# Altium PCB StepTMC5160.PcbDoc (part 2 of 3)
Units mm, origin at the board's own origin, x right, y up, seen from the top; angles counter-clockwise.
Board outline 109.42 x 88.01 mm, 4 copper layers (Component Side, GND, VCC, Bottom Layer), stack 0.778 mm thick; 190 components, 123 nets, 661 pads, 738 vias.
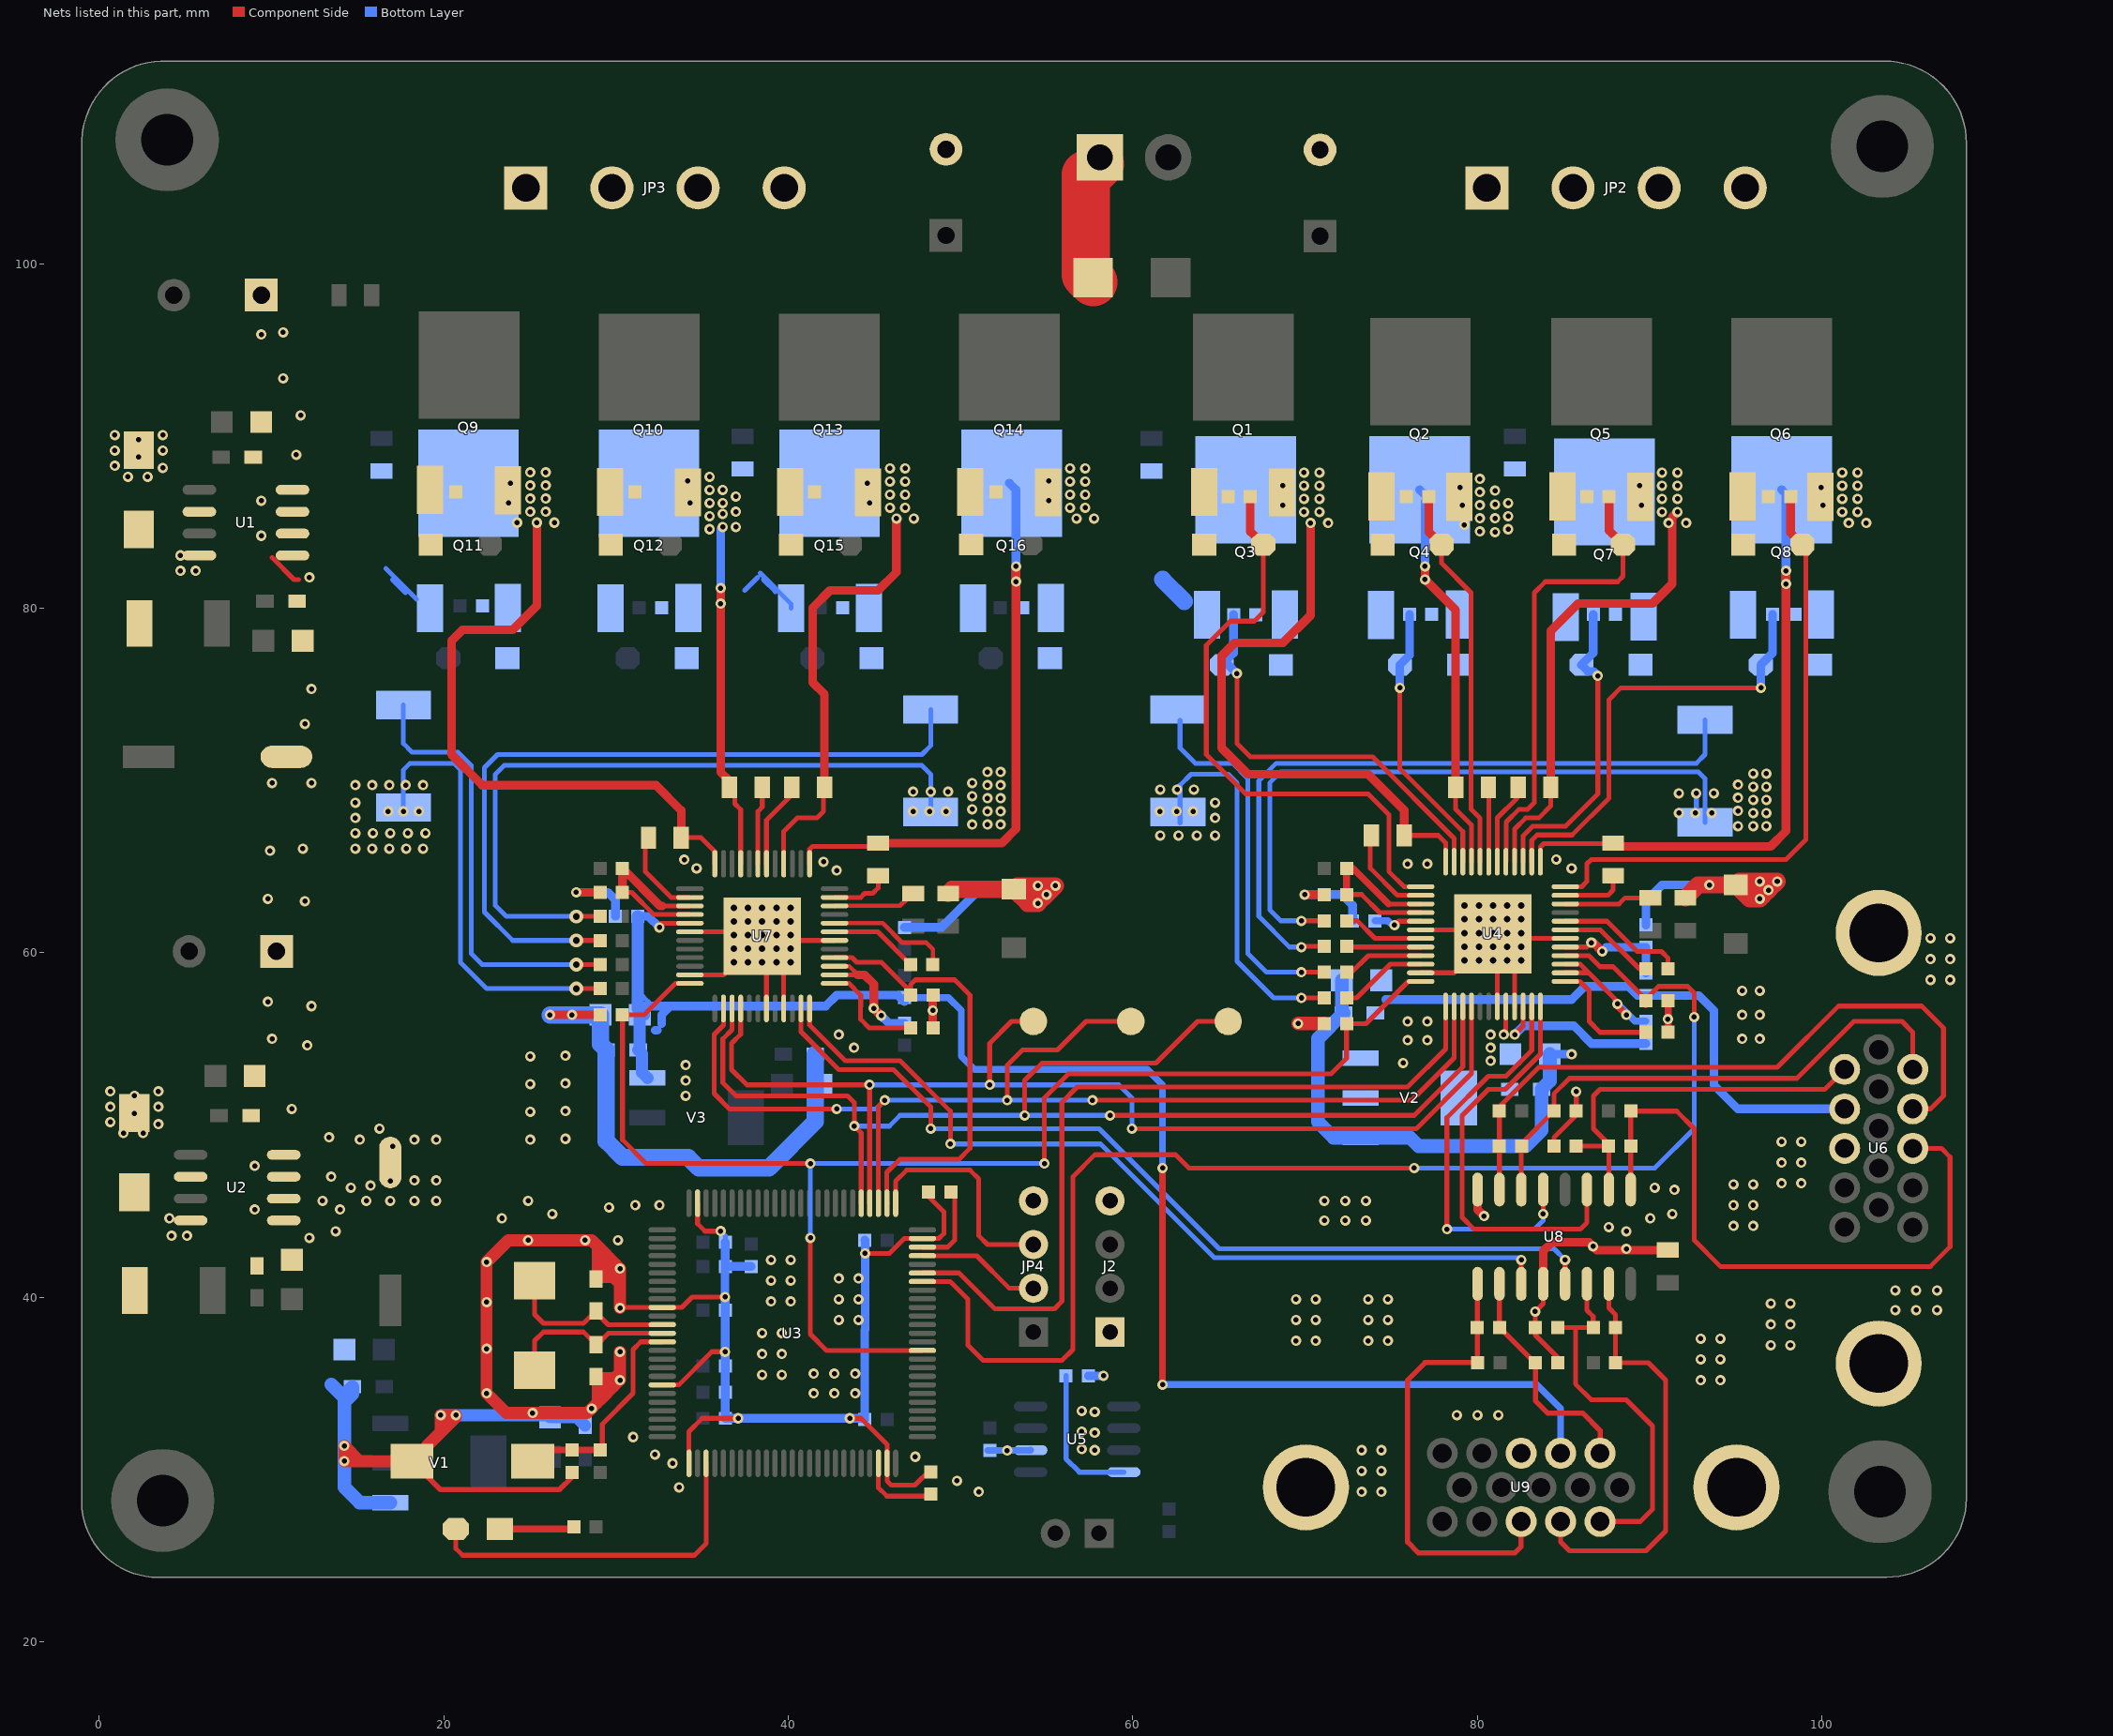
[diagram p4: the nets of this part, all layers, seen from the top]

## Via types
v1: diameter 0.6, hole 0.3, Component Side to Bottom Layer, 596 vias
v2: diameter 0.8, hole 0.4, Component Side to Bottom Layer, 60 vias
v3: diameter 0.762, hole 0.381, Component Side to Bottom Layer, 50 vias
v4: diameter 0.5, hole 0.5, Component Side to Bottom Layer, tented both sides, 32 vias

## Nets (pads, with @x,y where several pads share a name; then routed paths per layer and width w, separated by ;. In a path a pad name is that pad's centre, name@x,y a point inside that pad or via, vN(x,y) a via of type N, cw(c..) or ccw(c..) an arc to the next point about the centre after c; other vN are vias at no path point) (continued)
DGND: C1.1 C4.1 C5.1 C6.1 C7.1 C8.1 C9.2 C10.1 C11.1 C12.2 C15.1 C16.1 C17.1 C18.1 C19.1 C20.1 C21.1 C22.1 C23.2 C24.2 C25.1 C26.1 C27.1 C28.1 C33.1 C34.1 C35.1 C40.1 C41.1 C42.2 C43.2 C55.1 C56.1 C57.1 C58.1 C59.1 C60.1 C61.1 C62.1 C63.1 C64.1 C65.1 C66.1 CE1.2 CE2.1 CE3.1 CE4.2 D3.1 D6.1 D13.1 E1.2 E2.2 E3.2 E4.2 J2.1 J2.4 JP1.1 JP4.4 R8.1 R9.2 R15.2 R19.2 R20.1 R22.2 R23.2 R24.2 R32.1 R33.2 R39.2 R43.2 R45.1 R47.2 R48.2 R51.1 R53.1 R55.1 R58.1 R63.1 S1.2 U1.4 U1.5 U1.6 U1.7 U1.8 U2.4 U2.5 U2.6 U2.7 U2.8 U3.10 U3.19 U3.26 U3.49 U3.74 U3.99 U4.6 U4.11 U4.19 U4.21 U4.30 U4.49 U5.2 U6.3 U6.16 U6.17 U7.6 U7.11 U7.19 U7.21 U7.30 U7.49 U8.8 U8.12 U9.3 U9.16 U9.17 V1.1 V2.1 V3.1 | length 472.3
  Component Side w0.279: 10.033,82.931 11.303,81.661 11.557,81.661 ; v2(27.686,57.912) R33.2@29.068,57.912 ; v2(27.686,62.103) R48.2@29.068,62.103 ; v1(30.226,39.37) 30.259,39.403 U3.10@32.678,39.403 33.815,39.403 34.417,40.005 v1(36.322,40.005) ; U3.19@32.678,34.903 33.633,34.903 35.56,36.83 v1(36.322,36.83) ; U3.26@34.228,30.353 34.228,32.196 34.998,32.966 v1(37.084,32.966) ; U7.6@34.277,61.214 U7.6@34.282,61.209 38.232,61.209 U7.49@38.481,60.96 ; U7.11@34.282,58.71 36.231,58.71 U7.49@38.481,60.96 ; U3.99@34.728,45.453 34.728,44.266 35.164,43.83 v1(36.068,43.83) ; U7.19@38.73,56.759 U7.49@38.73,60.711 ; U7.21@39.731,56.759 39.731,59.71 U7.49@38.732,60.709 ; U7.30@42.68,60.709 39.306,60.709 U7.49@38.732,60.709 ; v1(43.561,32.966) 44.22,32.966 45.728,31.458 U3.49@45.728,30.353 45.728,29.329 45.974,29.083 47.341,29.083 C43.2@48.26,30.002 ; v1(44.45,42.545) 45.877,42.545 46.735,43.403 U3.74@47.778,43.403 48.737,43.403 49.022,43.688 49.022,44.958 48.133,45.847 C42.2@48.133,46.101 ; v1@69.723,61.849 R23.2@71.105,61.849 ; v1@69.818,57.372 R9.2@71.105,57.372 ; U4.11@76.708,58.826 78.656,58.826 U4.49@80.907,61.077 ; U4.6@76.708,61.326 U4.49@79.007,61.326 ; U4.49@80.658,61.326 U4.49@80.907,61.077 ; U4.19@81.156,56.876 U4.49@81.156,60.764 ; U4.21@82.156,56.876 82.156,59.827 U4.49@81.158,60.825 ; U8.12@83.82,40.776 83.82,39.624 v1(83.36,39.164) R53.1@83.36,38.227 83.36,37.798 84.668,36.49 R63.1@84.668,36.195 ; R55.1@84.44,48.768 84.44,49.261 85.74,50.561 R58.1@85.74,50.8 v1(85.74,51.928) v1@85.725,51.943 ; U4.30@85.105,60.825 U4.49@81.158,60.825 ; U7.49@38.481,60.96 U7.49@38.73,60.711 ; U7.49@38.73,60.711 U7.49@38.732,60.709 ; U4.49@80.907,61.077 U4.49@81.158,60.825
  Component Side w0.3: S1.2@18.146,30.48 19.797,28.829 26.7,28.829 27.432,29.561 C63.1@27.432,29.83
  Component Side w0.4: R22.2@91.074,55.372 R19.2@91.074,57.213
  Component Side w0.5: v1(26.162,56.388) v1(27.432,56.388) R39.2@29.068,56.388 ; v1(27.686,63.5) C34.1@29.068,63.5 ; 28.892,33.846 28.829,33.909 28.829,34.544 ; 28.956,42.926 28.829,42.799 28.829,42.037 ; 29.21,34.163 28.829,34.544 ; 29.337,42.545 28.829,42.037 ; 29.591,42.291 C64.1@28.829,41.529 ; 29.845,34.798 29.426,34.798 ; v1(30.226,35.179) 30.01,35.395 ; 30.226,40.64 29.807,41.059 ; 30.226,41.021 30.188,41.059 30.086,41.059 ; R47.2@48.402,55.626 48.387,55.641 v1(48.387,56.642) 48.387,57.516 R43.2@48.402,57.531 ; v1(69.977,63.373) C1.1@71.105,63.373 ; U8.8@80.01,46.247 80.01,45.085 v1(80.391,44.704) ; U8.12@83.82,40.776 83.82,42.672 84.328,43.18 86.487,43.18 v1(86.71,42.957) 86.934,42.733 C66.1@91.059,42.733 ; 28.829,34.544 C65.1@28.829,35.395 ; C65.1@28.829,35.395 29.426,34.798 ; C65.1@28.829,35.395 30.01,35.395 ; C64.1@28.829,41.059 C64.1@28.829,41.529 ; C64.1@28.829,41.059 C64.1@29.121,41.059 ; C64.1@28.829,41.059 29.458,41.688 ; C64.1@28.829,41.529 28.829,42.037 ; C64.1@29.121,41.059 29.35,41.288 ; C64.1@29.121,41.059 29.807,41.059 ; 29.35,41.288 29.578,41.288 29.807,41.059 ; 29.35,41.288 29.604,41.542 ; 29.426,34.798 29.426,34.811 30.01,35.395 ; 29.458,41.688 29.604,41.542 ; 29.458,41.688 29.68,41.91 29.972,41.91 29.604,41.542 ; 29.604,41.542 30.086,41.059 ; 29.807,41.059 30.086,41.059
  Component Side w0.7: 29.426,34.798 29.21,34.582 29.21,34.163 ; 30.01,35.395 30.226,35.611 ; v1(30.226,36.83) 30.226,35.611 ; v1(30.226,39.37) 30.226,40.64 30.226,41.021 v1(30.226,41.656) 29.972,41.91 29.591,42.291 29.337,42.545 28.956,42.926 28.575,43.307 v1(28.194,43.307) v1(24.892,43.307) 23.749,43.307 v1(22.479,42.037) v1(22.479,39.709) v1(22.479,36.999) v1(22.479,34.417) 23.622,33.274 v1(25.146,33.274) 28.321,33.274 v1(28.575,33.528) 28.892,33.846 29.21,34.163 ; 15.113,30.48 v1(14.224,31.369) v1(14.224,30.48) 15.113,30.48 ; 15.113,30.48 S1.2@18.146,30.48 19.812,32.146 ; 19.812,32.146 20.701,33.035 v1(20.701,33.147) v1(19.812,33.147) 19.812,32.146 ; 29.21,34.163 29.845,34.798 v1(30.226,35.179) 30.226,35.611
  Component Side w0.8: v1(69.596,55.88) R15.2@71.105,55.88
  Component Side w1: C35.1@49.276,63.434 49.518,63.676 E3.2@53.086,63.676 ; C4.1@92.075,63.18 92.825,63.93 v1(93.472,63.93) E4.2@94.996,63.93 ; E3.2@53.086,63.676 55.04,63.676 v1@55.245,63.881 ; E3.2@53.086,63.676 53.897,62.865 v1(54.483,62.865) v1(54.991,63.373) v1(55.499,63.881) v1@55.245,63.881 ; E3.2@53.086,63.676 53.291,63.881 v1(54.483,63.881) v1@55.245,63.881 ; E4.2@94.996,63.93 96.95,63.93 v1@97.155,64.135 ; E4.2@94.996,63.93 95.201,64.135 v1(96.393,64.135) v1@97.155,64.135 ; E4.2@94.996,63.93 95.807,63.119 v1(96.393,63.119) v1(96.901,63.627) v1(97.409,64.135) v1@97.155,64.135
  Component Side w2.8: D13.1@57.694,98.933 57.277,99.35 57.277,105.156 57.456,105.156 JP1.1@58.091,105.791
  Bottom Layer w0.279: R32.1@17.653,68.424 17.653,70.612 18.034,70.993 20.574,70.993 20.955,70.612 20.955,59.436 22.479,57.912 v2(27.686,57.912) ; v2(27.686,62.103) 23.622,62.103 22.987,62.738 22.987,70.358 23.495,70.866 47.752,70.866 48.26,70.358 v1(48.26,69.342) R45.1@48.26,68.17 ; v1(36.068,43.83) 36.337,43.561 C61.1@36.337,43.18 ; R8.1@62.738,67.535 62.738,69.723 63.373,70.358 65.532,70.358 66.04,69.85 66.04,59.5 68.167,57.372 v1(69.787,57.372) v1@69.818,57.372 ; v1(69.787,61.849) 68.58,61.849 67.945,62.484 67.945,69.85 68.58,70.485 92.837,70.485 93.218,70.104 R20.1@93.218,67.564 ; R20.1@92.71,68.072 v1(92.71,69.244)
  Bottom Layer w0.4: C33.1@51.562,31.1 C33.1@51.689,31.1 v1(52.705,31.1) 54.049,31.1 U5.2@54.064,31.115
  Bottom Layer w0.5: v1(27.686,63.5) 29.518,63.5 29.957,63.061 C41.1@29.957,62.103 ; C61.1@36.337,43.18 C57.1@36.337,41.783 ; R51.1@37.846,41.768 37.831,41.783 C57.1@36.337,41.783 ; C55.1@44.435,43.307 44.45,43.292 v1(44.45,42.545) 44.45,38.115 44.435,38.1 C62.1@44.435,32.893 44.362,32.966 v1(43.561,32.966) v1(37.084,32.966) C60.1@36.337,32.966 C59.1@36.337,34.49 C56.1@36.337,36.014 C58.1@36.337,39.243 36.337,39.99 v1(36.322,40.005) 36.322,41.768 C57.1@36.337,41.783 ; C40.1@46.736,61.468 48.895,61.468 51.308,63.881 v1(54.483,63.881) v1(55.499,63.881) ; R24.2@57.419,35.433 v1(58.293,35.433) ; v1(69.977,63.373) 72.136,63.373 72.756,62.753 C16.1@72.756,61.849 ; C19.1@84.201,54.102 v1(85.471,54.102) ; C15.1@89.789,61.61 89.789,62.992 90.727,63.93 v1(93.472,63.93)
  Bottom Layer w0.7: v1(19.812,33.147) v1(20.701,33.147) 26.035,33.147 C10.1@26.162,33.02 27.724,33.02 C11.1@28.194,32.55
  Bottom Layer w0.8: 13.462,34.925 14.059,34.328 14.224,34.328 ; V1.1@16.891,28.067 15.113,28.067 14.224,28.956 v1(14.224,30.48) v1(14.224,31.369) 14.224,33.909 ; C17.1@72.136,58.395 72.136,56.579 C18.1@72.225,56.49 70.739,55.004 70.739,50.165 71.642,49.262 V2.1@73.223,49.262 76.09,49.262 76.584,48.768 82.804,48.768 83.731,49.695 C20.1@83.731,52.07 84.201,52.54 C19.1@84.201,54.102 ; 14.224,33.909 14.694,34.379 C8.1@14.694,34.798 14.224,34.328 ; 14.224,33.909 14.224,34.328
  Bottom Layer w1: v1(26.162,56.388) v1(27.432,56.388) C25.1@29.083,56.388 29.083,54.699 C26.1@29.426,54.356 29.426,49.06 30.367,48.119 V3.1@31.821,48.119 34.177,48.119 34.798,47.498 38.862,47.498 41.567,50.203 C28.1@41.567,54.102
  other v1: 51.054,28.702 73.279,28.702 74.422,28.702 33.655,28.956 49.784,29.337 73.279,29.909 74.422,29.909 33.274,30.353 47.371,30.734 32.258,30.861 57.785,31.115 73.279,31.115 74.422,31.115 57.023,31.178 30.988,31.877 57.785,32.131 57.023,32.194 78.803,33.147 80.01,33.147 81.216,33.147 57.785,33.337 57.023,33.401 41.465,34.417 42.672,34.417 43.878,34.417 92.964,35.179 94.107,35.179 38.481,35.496 39.624,35.496 41.465,35.56 42.672,35.56 43.878,35.56 92.964,36.386 94.107,36.386 38.481,36.703 39.624,36.703 97.028,37.211 98.171,37.211 69.469,37.465 70.612,37.465 73.66,37.465 74.803,37.465 92.964,37.592 94.107,37.592 38.481,37.91 39.624,37.91 97.028,38.417 98.171,38.417 42.926,38.672 44.069,38.672 69.469,38.672 70.612,38.672 73.66,38.672 74.803,38.672 104.267,39.243 105.474,39.243 106.68,39.243 97.028,39.624 98.171,39.624 38.989,39.751 40.132,39.751 42.926,39.878 44.069,39.878 69.469,39.878 70.612,39.878 73.66,39.878 74.803,39.878 104.267,40.386 105.474,40.386 106.68,40.386 38.989,40.957 40.132,40.957 42.926,41.084 44.069,41.084 38.989,42.164 40.132,42.164 88.646,42.799 30.099,43.307 12.192,43.434 4.191,43.561 5.08,43.561 13.716,43.815 88.646,43.815 87.63,44.069 94.869,44.133 96.012,44.133 71.12,44.45 72.326,44.45 73.533,44.45 4.064,44.577 23.368,44.577 90.043,44.577 26.289,44.831 91.313,44.831 9.017,45.085 13.97,45.085 29.591,45.212 31.115,45.339 32.512,45.339 94.869,45.339 96.012,45.339 12.954,45.593 15.494,45.593 16.891,45.593 18.288,45.593 19.558,45.593 24.892,45.593 71.12,45.593 72.326,45.593 73.533,45.593 91.44,46.228 14.605,46.355 90.297,46.355 15.748,46.482 94.869,46.545 96.012,46.545 97.663,46.609 98.806,46.609 16.891,46.736 18.288,46.778 19.558,46.778 13.462,46.99 9.017,47.625 97.663,47.816 98.806,47.816 17.018,48.768 97.663,49.022 98.806,49.022 15.113,49.149 18.288,49.149 19.558,49.149 25.019,49.149 27.051,49.191 13.335,49.276 1.397,49.53 2.54,49.53 16.256,49.784 3.429,50.038 0.635,50.165 2.032,50.673 25.019,50.758 27.051,50.8 11.176,50.927 0.635,51.054 3.429,51.054 2.032,51.689 34.036,51.689 0.635,51.943 3.429,51.943 25.019,52.366 27.051,52.409 34.036,52.578 34.036,53.467 75.692,53.594 25.019,53.975 27.051,54.017 43.815,54.483 12.065,54.61 75.946,54.912 77.089,54.912 10.033,54.991 95.377,54.991 96.393,54.991 42.926,55.245 75.946,56.007 77.089,56.007 91.059,56.134 95.377,56.388 96.393,56.388 12.319,56.896 9.779,57.15 95.377,57.785 96.393,57.785 106.299,58.42 107.442,58.42 106.299,59.627 107.442,59.627 106.299,60.833 107.442,60.833 11.938,62.992 9.779,63.119 42.799,64.77 34.671,64.897 85.471,64.897 75.946,65.151 77.089,65.151 42.037,65.278 33.955,65.397 84.582,65.405 9.906,65.913 11.811,66.04 14.859,66.04 15.843,66.04 16.828,66.04 17.812,66.04 18.796,66.04 61.595,66.802 62.653,66.802 63.712,66.802 64.77,66.802 14.859,66.929 15.875,66.929 16.891,66.929 17.907,66.929 18.923,66.929 95.123,67.339 96.012,67.339 96.774,67.339 50.673,67.437 51.562,67.437 52.324,67.437 14.859,67.818 64.77,67.818 91.694,68.101 92.647,68.101 93.599,68.101 96.012,68.101 96.774,68.101 16.764,68.199 17.653,68.199 18.542,68.199 47.244,68.199 48.197,68.199 49.149,68.199 51.562,68.199 52.324,68.199 61.563,68.199 62.547,68.199 63.5,68.199 95.123,68.228 50.673,68.326 14.859,68.707 64.77,68.707 96.012,68.863 96.774,68.863 51.562,68.961 52.324,68.961 95.123,68.99 50.673,69.088 91.694,69.244 93.726,69.244 47.244,69.342 49.276,69.342 61.595,69.469 62.569,69.469 63.542,69.469 96.012,69.625 96.774,69.625 14.859,69.723 15.843,69.723 16.828,69.723 17.78,69.723 18.796,69.723 51.562,69.723 52.324,69.723 95.123,69.752 10.033,69.85 12.319,69.85 50.673,69.85 96.012,70.387 96.774,70.387 51.562,70.485 52.324,70.485 11.938,73.279 12.319,75.311 12.192,81.788 4.699,82.169 5.588,82.169 4.699,83.058 9.398,84.201 9.398,86.233 1.651,87.63 2.794,87.63 3.683,88.138 0.889,88.265 2.286,88.773 11.43,88.9 0.889,89.154 3.683,89.154 2.286,89.789 0.889,90.043 3.683,90.043 11.684,91.186 10.668,93.345 9.398,95.885 10.668,96.012
  other v3: 36.83,59.436 37.655,59.436 38.481,59.436 39.306,59.436 40.132,59.436 79.256,59.553 80.081,59.553 80.907,59.553 81.732,59.553 82.558,59.553 36.83,60.23 37.655,60.23 38.481,60.23 39.306,60.23 40.132,60.23 79.256,60.347 80.081,60.347 80.907,60.347 81.732,60.347 82.558,60.347 36.83,61.023 37.655,61.023 38.481,61.023 39.306,61.023 40.132,61.023 79.256,61.14 80.081,61.14 80.907,61.14 81.732,61.14 82.558,61.14 36.83,61.817 37.655,61.817 38.481,61.817 39.306,61.817 40.132,61.817 79.256,61.934 80.081,61.934 80.907,61.934 81.732,61.934 82.558,61.934 36.83,62.611 37.655,62.611 38.481,62.611 39.306,62.611 40.132,62.611 79.256,62.728 80.081,62.728 80.907,62.728 81.732,62.728 82.558,62.728
LED: LED1.2 U3.28 | length 20.8
  Component Side w0.279: LED1.2@20.701,26.543 20.701,25.4 21.082,25.019 34.544,25.019 35.228,25.703 U3.28@35.228,30.353
M1_ENA+: R54.2 R55.2 U6.1 U8.2 | length 22.9
  Component Side w0.279: R55.2@85.74,48.768 R54.2@87.615,48.768 ; U8.2@87.63,46.247 87.63,48.753 R54.2@87.615,48.768 ; U6.1@101.321,53.223 100.167,52.07 87.122,52.07 86.741,51.689 86.741,49.784 87.615,48.91 R54.2@87.615,48.768
M1_ENA-: R50.1 R54.1 U6.13 U8.1 | length 38.7
  Component Side w0.279: U8.1@88.9,46.247 88.9,50.785 R50.1@88.915,50.8 91.567,50.8 92.583,49.784 92.583,43.307 94.107,41.783 106.299,41.783 107.442,42.926 107.442,48.133 106.934,48.641 U6.13@105.283,48.641
M1_ENB+: R58.2 R59.2 U6.11 U8.6 | length 31.3
  Component Side w0.279: U8.6@82.55,46.247 82.55,48.753 R59.2@82.565,48.768 82.565,48.925 R58.2@84.44,50.8 84.44,51.801 85.344,52.705 98.552,52.705 101.854,56.007 104.648,56.007 105.283,55.372 U6.11@105.283,53.223
M1_ENB-: R59.1 R61.1 U6.12 U8.7 | length 39.6
  Component Side w0.279: U8.7@81.28,46.247 81.28,50.785 R61.1@81.265,50.8 81.265,51.039 83.566,53.34 97.409,53.34 100.965,56.896 105.791,56.896 107.061,55.626 107.061,51.689 106.304,50.932 U6.12@105.283,50.932
M1_ENCA: U4.24 U8.3 | length 24.3
  Component Side w0.279: U4.24@83.657,56.876 83.657,54.109 81.619,52.07 80.645,52.07 79.121,50.546 79.121,44.63 79.809,43.942 85.979,43.942 86.36,44.323 U8.3@86.36,46.247
M1_ENCB: U4.23 U8.5 | length 23.2
  Component Side w0.279: v1(78.232,43.942) 78.232,50.419 80.645,52.832 81.661,52.832 83.157,54.328 U4.23@83.157,56.876 ; v1(83.82,44.831) U8.5@83.82,46.247
  Bottom Layer w0.279: v1(78.232,43.942) 83.312,43.942 83.82,44.45 v1(83.82,44.831)
M1_ENCN: R22.1 U4.25 | length 7.1
  Component Side w0.279: U4.25@85.105,58.326 85.946,58.326 86.487,57.785 86.487,56.007 87.122,55.372 89.535,55.372 R22.1@89.789,55.626
M2_ENA+: R60.2 R63.2 U8.10 U9.1 | length 13.5
  Component Side w0.3: U8.10@81.28,40.776 81.28,38.242 R60.2@81.295,38.227 83.327,36.195 R63.2@83.368,36.195 83.368,33.98 84.074,33.274 86.106,33.274 87.122,32.258 U9.1@87.122,30.937
M2_ENA-: R60.1 R62.1 U8.9 U9.13 | length 26.9
  Component Side w0.3: U8.9@80.01,40.776 R62.1@80.01,36.195 76.962,36.195 75.946,35.179 75.946,25.781 76.581,25.146 82.169,25.146 82.54,25.517 U9.13@82.54,26.975
M2_ENB+: R53.2 R57.1 U8.14 U9.11 | length 21.7
  Component Side w0.279: R53.2@84.66,38.227 85.693,38.227 ; U8.14@86.36,40.776 86.36,39.243 86.726,38.877 R57.1@86.726,38.227 85.693,38.227 ; U9.11@87.122,26.975 89.459,26.975 90.17,27.686 90.17,32.512 88.646,34.036 86.614,34.036 85.693,34.957 85.693,38.227
M2_ENB-: R52.1 R57.2 U8.15 U9.12 | length 24.8
  Component Side w0.279: U9.12@84.831,26.975 84.831,25.786 85.344,25.273 89.789,25.273 90.932,26.416 90.932,35.179 89.916,36.195 R52.1@88.026,36.195 R57.2@88.026,38.227 88.026,38.974 87.63,39.37 U8.15@87.63,40.776
M2_ENCA: U7.24 U8.11 | length 50.3
  Component Side w0.279: U7.24@41.232,56.759 41.232,55.796 43.307,53.721 46.482,53.721 49.403,50.8 v1(49.403,48.895) ; U8.11@82.55,40.776 v1(82.55,42.164)
  Bottom Layer w0.279: v1(49.403,48.895) 58.124,48.895 64.728,42.291 v1@82.423,42.291
M2_ENCB: U7.23 U8.13 | length 53.3
  Component Side w0.279: U7.23@40.731,56.759 40.731,55.408 42.926,53.213 46.101,53.213 48.26,51.054 v1(48.26,49.784) ; U8.13@85.09,40.776 v1(85.09,42.164)
  Bottom Layer w0.279: v1(48.26,49.784) 58.039,49.784 65.019,42.804 84.45,42.804 v1(85.09,42.164)
M2_ENCN: R47.1 U7.25 | length 6.3
  Component Side w0.259: 46.467,55.626 R47.1@47.102,55.626
  Component Side w0.279: U7.25@42.68,58.209 43.518,58.209 44.201,57.526 44.201,56.885 44.196,56.881 44.196,56.134 44.709,55.621 45.731,55.621 45.735,55.626 46.467,55.626
NetC2_1: C2.1 Q3.3 Q4.3 R7.2 R8.2 | length 23.1
  Component Side w0.279: v1(69.787,58.865) R7.2@71.105,58.865
  Bottom Layer w0.279: R8.2@62.738,73.485 62.738,71.882 63.627,70.993 65.786,70.993 66.675,70.104 66.675,59.944 67.754,58.865 v1(69.787,58.865)
  Bottom Layer w1: 61.722,81.661 62.992,80.391
NetC3_1: C3.1 Q7.3 Q8.3 R18.2 R20.2 | length 41
  Component Side w0.279: v1@69.723,60.325 69.755,60.357 R18.2@71.105,60.357
  Bottom Layer w0.279: v1(69.787,60.325) 69.088,60.325 67.31,62.103 67.31,69.977 68.326,70.993 92.71,70.993 93.218,71.501 R20.2@93.218,73.514
NetC31_1: C31.1 U4.34 | length 5.1
  Component Side w0.279: U4.34@85.105,62.827 88.227,62.827 88.58,63.18 C31.1@90.043,63.18
NetC32_1: C32.1 U4.32 | length 7.5
  Component Side w0.279: U4.32@85.105,61.826 87.526,61.826 89.281,60.071 90.678,60.071 91.074,59.675 C32.1@91.074,59.055
NetC32_2: C32.2 U4.31 | length 5.6
  Component Side w0.279: U4.31@85.105,61.326 87.137,61.326 89.408,59.055 C32.2@89.774,59.055
NetC36_1: C36.1 Q11.3 Q12.3 R31.2 R32.2 | length 29
  Component Side w0.279: v2(27.686,59.309) R31.2@29.068,59.309
  Bottom Layer w0.279: 16.637,82.296 18.415,80.518 ; 17.018,81.661 17.78,80.899 ; R32.2@17.653,74.374 17.653,72.136 18.161,71.628 20.828,71.628 21.59,70.866 21.59,59.944 22.225,59.309 v2(27.686,59.309)
NetC37_1: C37.1 Q15.3 Q16.3 R42.2 R45.2 | length 49.2
  Component Side w0.279: v2(27.686,60.706) R42.2@29.068,60.706
  Bottom Layer w0.279: v2(27.686,60.706) 24.003,60.706 22.352,62.357 22.352,70.739 23.114,71.501 47.752,71.501 48.26,72.009 R45.2@48.26,74.12 ; 37.465,81.026 38.227,81.788 ; 38.354,82.042 40.148,80.248 Q15.3@40.148,79.99 ; 38.547,81.656 39.243,80.959
NetC42_1: C42.1 U3.73 | length 4.9
  Component Side w0.279: U3.73@47.778,42.903 49.253,42.903 49.657,43.307 49.657,45.877 C42.1@49.433,46.101
NetC43_1: C43.1 U3.48 | length 4.8
  Component Side w0.279: U3.48@45.228,30.353 45.228,28.94 45.72,28.448 48.006,28.448 C43.1@48.26,28.702
NetC46_1: C46.1 U7.34 | length 4.8
  Component Side w0.279: U7.34@42.68,62.71 46.482,62.738 C46.1@47.244,63.434
NetC47_1: C47.1 U7.32 | length 7.2
  Component Side w0.259: U7.32@42.68,61.709 45.479,61.709 46.609,60.579 48.006,60.579 48.387,60.198 C47.1@48.387,59.309
NetC47_2: C47.2 U7.31 | length 5.2
  Component Side w0.279: U7.31@42.68,61.209 45.187,61.209 C47.2@47.087,59.309
NetD1_1: D1.1 Q1.1 R1.2
NetD2_1: D2.1 Q2.1 R2.2
NetD3_2: D3.2 L1.1 U1.2
NetD4_1: D4.1 Q3.1 R6.2
NetD5_1: D5.1 Q4.1 R5.2
NetD6_2: D6.2 L2.1 U2.2
NetD7_1: D7.1 Q5.1 R13.2
NetD8_1: D8.1 Q6.1 R14.2
NetD9_1: D9.1 Q7.1 R16.2
NetD10_1: D10.1 Q8.1 R17.2
NetD11_1: D11.1 Q9.1 R26.2
NetD12_1: D12.1 Q10.1 R27.2
NetD14_1: D14.1 Q11.1 R30.2
NetD15_1: D15.1 Q12.1 R29.2
NetD16_1: D16.1 Q13.1 R37.2
NetD17_1: D17.1 Q14.1 R38.2
NetD18_1: D18.1 Q15.1 R40.2
NetD19_1: D19.1 Q16.1 R41.2
NetLED1_1: LED1.1 R49.1 | length 4.4
  Component Side w0.4: LED1.1@23.241,26.543 27.417,26.543 R49.1@27.544,26.67
NetR21_1: R21.1 U4.26 U4.27 | length 8.3
  Component Side w0.279: U4.26@85.105,58.826 86.434,58.826 ; U4.27@85.105,59.327 85.961,59.327 87.978,57.31 87.978,57.27 88.138,57.11 v1(88.138,57.023)
  Component Side w0.4: v1(88.138,57.023) 88.138,56.896 v1(88.646,56.388)
  Bottom Layer w0.4: v1(88.138,57.023) 89.139,56.022 R21.1@89.774,56.022
NetR24_1: R24.1 U5.8 | length 8.5
  Bottom Layer w0.3: R24.1@56.119,35.433 56.119,30.622 56.896,29.845 U5.8@59.474,29.845
NetR46_1: R46.1 U7.26 U7.27 | length 8.2
  Component Side w0.254: U7.27@42.68,59.21 43.533,59.21 44.033,58.71
  Component Side w0.279: U7.26@42.68,58.71 44.033,58.71
  Component Side w0.5: 44.033,58.71 44.414,58.71 44.958,58.166 v1(44.958,56.769) v1(45.387,56.34)
  Bottom Layer w0.5: v1(44.958,56.769) v1(45.387,56.34) 45.817,55.91 R46.1@46.736,55.91
OSC_IN: C64.2 U3.12 X1.2 | length 10
  Component Side w0.279: X1.2@25.019,41.046 25.273,40.792 25.273,38.989 25.781,38.481 28.105,38.481 C64.2@28.829,39.205 ; C64.2@29.083,38.862 29.542,38.403 U3.12@32.678,38.403
OSC_OUT: C65.2 U3.13 X1.1 | length 10
  Component Side w0.279: X1.1@25.019,35.846 25.273,36.1 25.273,37.465 25.781,37.973 28.105,37.973 C65.2@28.829,37.249 28.829,37.176 29.556,37.903 U3.13@32.678,37.903
RST: C63.2 R44.1 S1.1 U3.14 | length 12.7
  Component Side w0.279: R44.1@29.083,31.13 29.199,31.246 29.199,32.628 30.988,34.417 30.988,36.957 31.434,37.403 U3.14@32.678,37.403
  Component Side w0.4: S1.1@25.146,30.48 25.796,31.13 C63.2@27.432,31.13 R44.1@29.083,31.13
SPI1_SCK: SCK1.1 U3.78 U4.14 U7.14 | length 69.2
  Component Side w0.279: U7.14@36.231,56.759 36.231,55.789 35.687,55.245 35.687,51.816 36.576,50.927 v1(42.799,50.927) ; U3.78@45.228,45.453 45.228,51.07 v1(45.593,51.435) ; v1(52.705,51.435) 52.705,53.467 53.594,54.356 55.626,54.356 57.277,56.007 59.627,56.007 SCK1.1@59.88,55.753 ; v1(57.658,51.435) 76.2,51.435 78.656,53.891 U4.14@78.656,56.876
  Bottom Layer w0.279: v1(42.799,50.927) 45.085,50.927 v1(45.593,51.435) v1(52.705,51.435) v1(57.658,51.435)
SPI1_SDI: MOSI1.1 U3.80 U4.15 U7.15 | length 74.3
  Component Side w0.279: U7.15@36.731,56.759 36.731,55.527 36.195,54.991 36.195,52.451 36.957,51.689 43.434,51.689 43.831,51.292 v1(43.831,49.927) 44.228,49.53 U3.80@44.228,45.453 ; v1(53.721,50.546) 53.721,52.578 54.737,53.594 61.341,53.594 63.754,56.007 65.278,56.007 MOSI1.1@65.532,55.753 ; v1(58.674,50.551) 76.332,50.551 79.157,53.376 U4.15@79.157,56.876
  Bottom Layer w0.279: v1(43.831,49.927) 45.863,49.927 46.487,50.551 v1(58.674,50.551)
SPI1_SDO: MISO1.1 U3.79 U4.16 U7.16 | length 66.9
  Component Side w0.279: U7.16@37.231,56.759 37.231,55.265 36.703,54.737 36.703,53.213 37.592,52.324 v1(44.704,52.324) 44.718,52.31 44.718,45.463 U3.79@44.728,45.453 ; v1(51.689,52.324) 51.689,54.737 52.959,56.007 53.975,56.007 MISO1.1@54.229,55.753 ; v1(59.944,49.784) 76.454,49.784 79.657,52.987 U4.16@79.657,56.876
  Bottom Layer w0.279: v1(44.704,52.324) v1(51.689,52.324) 59.182,52.324 59.944,51.562 v1(59.944,49.784)
SWCLK: JP4.3 U3.76 | length 12.9
  Component Side w0.279: U3.76@46.228,45.847 46.228,46.736 46.863,47.371 50.546,47.371 51.054,46.863 51.054,43.561 51.562,43.053 JP4.3@54.229,43.053
SWDIO: JP4.2 U3.72 | length 7.2
  Component Side w0.279: U3.72@47.778,42.403 50.942,42.403 52.832,40.513 JP4.2@54.229,40.513
TMC_CLK: R15.1 R39.1 U3.61 U4.12 U7.12 | length 83.4
  Component Side w0.279: U7.12@34.282,58.209 33.444,58.209 31.623,56.388 R39.1@30.368,56.388 30.368,49.134 31.75,47.752 v1(41.275,47.752) ; v1(41.275,43.434) 41.275,37.846 42.218,36.903 U3.61@47.778,36.903 ; v1(54.864,47.752) 54.864,51.562 56.261,52.959 71.501,52.959 72.405,53.863 R15.1@72.405,55.88 73.533,55.88 75.979,58.326 U4.12@76.708,58.326
  Bottom Layer w0.279: v1(41.275,43.434) v1(41.275,47.752) v1(54.864,47.752)
U1_5VOUT: C16.2 C17.2 C18.2 R3.1 U4.5 U6.2 V2.3 | length 35.3
  Component Side w0.279: v1(75.184,61.595) 75.415,61.826 U4.5@76.708,61.826
  Bottom Layer w0.4: C16.2@74.056,61.849 74.803,61.849 75.057,61.595 v1(75.184,61.595)
  Bottom Layer w0.5: 74.676,57.277 85.471,57.277 86.233,58.039 88.773,58.039 89.296,57.516 R3.1@89.789,57.516 92.852,57.516 93.726,56.642 93.726,52.324 95.118,50.932 U6.2@101.321,50.932
U1_12VOUT: C1.2 R10.1 U4.3 U4.4 | length 11.4
  Component Side w0.279: C1.2@72.405,63.373 73.279,63.373 74.325,62.327 U4.4@76.708,62.327 ; 74.841,62.827 U4.3@76.708,62.827
  Component Side w0.4: C1.2@72.405,63.373 R10.1@72.405,64.897 72.771,64.897 74.841,62.827
U1_BMA1: C29.1 JP2.3 Q5.3 Q7.2 U4.40 | length 27.2
  Component Side w0.279: U4.40@82.156,65.275 82.156,67.17 82.804,67.818 83.566,67.818 84.262,68.514 C29.1@84.262,69.596 C29.1@84.262,70.104
  Component Side w0.5: C29.1@84.262,70.104 84.262,78.674 85.852,80.264 90.17,80.264 91.313,81.407 91.313,85.279 v1(91.612,85.578)
  other v1: 91.104,84.943 92.12,84.943 90.723,85.578 89.535,85.979 90.723,86.34 91.612,86.34 90.723,87.102 91.612,87.102 89.408,87.122 90.723,87.864 91.612,87.864
U1_BMA2: C30.1 JP2.4 Q6.3 Q8.2 U4.37 | length 35.9
  Component Side w0.279: U4.37@83.657,65.275 83.657,66.131 83.849,66.323 C30.1@87.503,66.323
  Component Side w0.5: C30.1@87.884,66.355 88.072,66.167 97.028,66.167 97.917,67.056 v1(97.917,81.407) v1(97.917,82.169)
  Bottom Layer w0.5: Q8.2@97.663,86.877 97.917,86.623 v1(97.917,82.169) v1(97.917,81.407)
  other v1: 101.561,84.943 102.577,84.943 101.18,85.578 102.069,85.578 100.076,85.979 101.18,86.34 102.069,86.34 99.949,86.995 101.18,87.102 102.069,87.102 101.18,87.864 102.069,87.864
U1_BMB1: C13.1 JP2.1 Q1.3 Q3.2 U4.48 | length 34.1
  Component Side w0.279: C13.1@75.753,66.802 77.724,66.802 78.156,66.37 U4.48@78.156,65.275
  Component Side w0.5: v1(70.319,84.943) 70.319,79.59 68.707,77.978 65.913,77.978 65.151,77.216 65.151,71.882 66.675,70.358 73.66,70.358 75.753,68.265 C13.1@75.753,66.802
  other v1: 71.335,84.943 69.938,85.578 70.827,85.578 68.707,85.979 69.938,86.34 70.827,86.34 69.938,87.102 70.827,87.102 68.707,87.122 69.938,87.864 70.827,87.864
U1_BMB2: C14.1 JP2.2 Q2.3 Q4.2 U4.45 | length 23.8
  Component Side w0.279: C14.1@78.74,69.596 78.74,68.326 79.657,67.409 U4.45@79.657,65.275
  Component Side w0.5: v1(76.962,82.423) v1(76.962,81.661) 78.74,79.883 C14.1@78.74,69.596
  Bottom Layer w0.5: Q4.2@76.654,86.871 77.153,86.373 76.962,86.182 v1(76.962,82.423) v1(76.962,81.661)
  other v1: 81.026,84.413 80.137,84.455 81.788,84.582 79.248,84.836 80.137,85.217 81.026,85.217 81.788,85.344 79.121,85.979 80.137,85.979 81.026,86.021 81.788,86.106 80.137,86.741 81.026,86.826 78.994,86.995 80.137,87.503
U1_CA1: C29.2 U4.42 | length 4.9
  Component Side w0.279: U4.42@81.156,65.275 81.156,67.821 82.296,68.961 C29.2@82.296,69.723
U1_CA2: C30.2 U4.35 | length 3.7
  Component Side w0.279: U4.35@85.105,63.325 87.582,63.325 87.884,63.627 C30.2@87.884,64.455
U1_CB1: C13.2 U4.2 | length 5.5
  Component Side w0.279: C13.2@73.787,66.802 73.787,64.897 75.359,63.325 U4.2@76.708,63.325
U1_CB2: C14.2 U4.43 | length 4.3
  Component Side w0.279: U4.43@80.658,65.275 C14.2@80.658,69.596
U1_DRV_ENN: R19.1 U3.69 U4.28 | length 77.6
  Component Side w0.279: U3.69@47.778,40.903 49.394,40.903 50.419,39.878 50.419,37.211 51.308,36.322 55.88,36.322 56.515,36.957 56.515,46.99 57.79,48.265 62.479,48.265 63.246,47.498 v1(76.327,47.498) ; U4.28@85.105,59.825 86.479,59.825 87.122,59.182 87.884,59.182 R19.1@89.774,57.292 ; R19.1@89.774,56.911 R19.1@89.774,57.213 R19.1@89.774,57.292 ; R19.1@89.781,57.285 R19.1@89.774,57.292 ; v1(92.583,56.261) 92.583,57.658 92.202,58.039 90.521,58.039 R19.1@89.774,57.292
  Bottom Layer w0.279: v1(76.327,47.498) 90.297,47.498 92.583,49.784 v1(92.583,56.261)
U1_HA1: D7.2 R13.1 U4.41 | length 27.1
  Component Side w0.279: U4.41@81.656,65.275 81.677,65.297 81.677,67.58 82.423,68.326 82.931,68.326 83.312,68.707 83.312,80.899 83.947,81.534 88.138,81.534 88.456,81.852 D7.2@88.456,83.687
  Component Side w0.5: R13.1@87.645,86.487 87.645,84.498 D7.2@88.456,83.687
U1_HA2: D8.2 R14.1 U4.36 | length 36
  Component Side w0.279: U4.36@85.105,63.825 86.05,63.825 86.36,64.135 86.36,65.151 86.614,65.405 97.917,65.405 99.06,66.548 99.06,83.497 D8.2@98.87,83.687
  Component Side w0.5: R14.1@98.186,86.487 98.186,84.371 D8.2@98.87,83.687
U1_HB1: D1.2 R1.1 U4.1 | length 35
  Component Side w0.279: D1.2@67.574,83.687 67.574,79.766 67.056,79.248 65.659,79.248 64.262,77.851 64.262,71.501 66.548,69.215 73.66,69.215 74.859,68.016 74.859,64.714 75.748,63.825 U4.1@76.708,63.825
  Component Side w0.5: R1.1@66.817,86.487 66.817,84.444 D1.2@67.574,83.687
U1_HB2: D2.2 R2.1 U4.44 | length 22.4
  Component Side w0.279: D2.2@77.924,83.687 77.924,82.604 79.629,80.899 79.629,68.326 80.157,67.798 U4.44@80.157,65.275
  Component Side w0.5: R2.1@77.177,86.481 77.177,84.434 D2.2@77.924,83.687
U1_LA1: D9.2 R16.1 U4.39 | length 18.1
  Component Side w0.279: U4.39@82.657,65.275 82.657,66.782 83.214,67.339 85.119,67.339 86.995,69.215 v1(86.995,76.073)
  Bottom Layer w0.5: R16.1@86.726,79.629 86.726,77.391 D9.2@86.042,76.708 86.423,76.327 86.741,76.327 v1(86.995,76.073)
U1_LA2: D10.2 R17.1 U4.38 | length 26.1
  Component Side w0.279: U4.38@83.157,65.275 83.157,66.52 83.468,66.831 85.5,66.831 87.63,68.961 87.63,74.676 88.328,75.374 v1(96.456,75.374)
  Bottom Layer w0.5: v1(96.456,75.374) D10.2@96.456,76.708 97.14,77.391 R17.1@97.14,79.629
U1_LB1: D4.2 R6.1 U4.47 | length 24.6
  Component Side w0.279: v1(66.04,76.2) 66.04,72.136 66.802,71.374 73.914,71.374 78.656,66.632 U4.47@78.656,65.275
  Bottom Layer w0.5: R6.1@65.844,79.623 65.844,77.386 D4.2@65.161,76.702 65.538,76.702 v1(66.04,76.2)
U1_LB2: D5.2 R5.1 U4.46 | length 16.1
  Component Side w0.279: v1(75.501,75.374) 75.501,70.675 79.157,67.02 U4.46@79.157,65.275
  Bottom Layer w0.5: v1(75.501,75.374) D5.2@75.501,76.708 76.058,77.264 R5.1@76.058,79.629
U1_SPI1_SCN: U3.70 U4.13 | length 46.7
  Component Side w0.279: U3.70@47.778,41.403 49.91,41.403 51.99,39.323 55.452,39.323 55.88,39.751 55.88,51.308 56.769,52.197 75.946,52.197 78.156,54.407 U4.13@78.156,56.876
U1_SRAH: R18.1 U4.8 | length 4.3
  Component Side w0.279: R18.1@72.405,60.357 72.437,60.325 U4.8@76.708,60.325
U1_SRAL: R23.1 U4.7 | length 4.7
  Component Side w0.279: R23.1@72.405,61.849 73.025,61.849 74.049,60.825 U4.7@76.708,60.825
U1_SRBH: R7.1 U4.9 | length 4.4
  Component Side w0.279: R7.1@72.708,58.865 73.668,59.825 U4.9@76.708,59.825
U1_SRBL: R9.1 U4.10 | length 4.9
  Component Side w0.279: R9.1@72.612,57.372 72.993,57.372 74.948,59.327 U4.10@76.708,59.327
U1_VCC: C15.2 R3.2 U4.29 | length 7.4
  Component Side w0.279: U4.29@85.105,60.325 86.36,60.325 v1(86.614,60.579) v1@86.741,60.579
  Component Side w0.5: v1@86.741,60.579 v1(87.249,60.071)
  Bottom Layer w0.5: v1(86.614,60.579) 86.741,60.579 v1(87.249,60.071) 87.488,60.31 C15.2@89.789,60.31 R3.2@89.789,58.816
U1_VCC_IO: C19.2 C20.2 R21.2 U4.20 U4.22 V2.2 V2.4 | length 11.8
  Component Side w0.279: v1(81.534,55.245) 81.656,55.367 U4.20@81.656,56.876 ; v1(82.169,55.245) 82.657,55.733 U4.22@82.657,56.876
  Bottom Layer w0.5: v1(82.169,55.245) 82.677,55.753 85.598,55.753 86.629,54.722 R21.2@89.774,54.722
  other v1: 80.772,53.721 80.772,54.483 80.772,55.245
U2_5VOUT: C25.2 C26.2 C41.2 R28.1 U7.5 U9.2 V3.3 | length 95
  Component Side w0.279: v1@32.626,61.709 U7.5@34.282,61.709
  Component Side w0.4: v1(61.722,34.925) v1(61.722,47.498)
  Bottom Layer w0.254: C25.2@31.369,56.388 31.369,56.642 31.369,56.866 31.369,57.658 ; 31.877,57.15 31.369,57.658 ; 31.369,57.658 31.369,57.673 ; 31.369,57.673 31.369,57.785 31.257,57.785 31.369,57.673
  Bottom Layer w0.4: R28.1@46.736,57.389 49.291,57.389 50.038,56.642 50.038,53.975 50.8,53.213 60.833,53.213 61.722,52.324 v1(61.722,47.498) ; v1(61.722,34.925) 83.439,34.925 84.831,33.533 U9.2@84.831,30.937
  Bottom Layer w0.5: C25.2@31.257,56.754 31.369,56.866 31.399,56.896 33.147,56.896 ; C41.2@31.257,62.103 31.877,62.103 v1(32.512,61.468) ; 32.258,55.499 32.385,55.499 ; 32.639,55.88 32.639,56.388 33.147,56.896 ; R28.1@46.736,57.15 46.355,57.531 42.799,57.531 42.164,56.896 33.147,56.896
  Bottom Layer w0.7: C41.2@31.257,62.103 31.257,57.785 31.257,56.754 31.369,56.642 C25.2@31.623,56.388 ; C25.2@31.369,56.388 31.369,54.445 C26.2@31.28,54.356 31.496,54.14 31.496,53.044 V3.3@31.821,52.719
U2_12VOUT: C34.2 R34.1 U7.3 U7.4 | length 10.8
  Component Side w0.279: C34.2@30.368,63.5 30.9,63.5 32.19,62.21 U7.4@34.282,62.21 ; 32.667,62.71 U7.3@34.282,62.71
  Component Side w0.5: C34.2@30.368,63.5 R34.1@30.368,64.897 ; R34.1@30.368,65.009 R34.1@30.368,64.897 ; 32.667,62.71 32.555,62.71 R34.1@30.368,64.897
U2_BMA1: C44.1 JP3.3 Q13.3 Q15.2 U7.40 | length 25.7
  Component Side w0.279: U7.40@39.731,65.159 39.731,67.036 40.513,67.818 41.656,67.818 42.037,68.199 42.037,69.342 C44.1@42.291,69.596
  Component Side w0.5: C44.1@42.098,69.596 42.098,74.996 41.402,75.692 41.402,80.01 42.418,81.026 45.212,81.026 46.273,82.087 v1(46.273,85.197)
  other v1: 47.289,85.197 45.892,85.832 46.781,85.832 44.704,86.106 45.892,86.594 46.781,86.594 44.577,87.249 45.892,87.356 46.781,87.356 45.892,88.118 46.781,88.118
U2_BMA2: C45.1 JP3.4 Q14.3 Q16.2 U7.37 | length 34.5
  Component Side w0.279: U7.37@41.232,65.159 41.232,65.997 41.402,66.167 44.958,66.167 C45.1@45.212,66.421
  Component Side w0.5: C45.1@45.212,66.355 52.385,66.355 53.213,67.183 v1(53.213,81.534) v1(53.213,82.423)
  Bottom Layer w0.5: Q16.2@52.832,87.258 53.213,86.877 v1(53.213,82.423) v1(53.213,81.534)
  other v1: 56.73,85.197 57.746,85.197 56.349,85.832 57.238,85.832 55.118,86.233 56.349,86.594 57.238,86.594 56.349,87.356 57.238,87.356 55.118,87.376 56.349,88.118 57.238,88.118
U2_BMB1: C38.1 JP3.1 Q9.3 Q11.2 U7.48 | length 36.7
  Component Side w0.279: C38.1@33.589,66.675 C38.1@33.782,66.675 34.925,66.675 35.73,65.87 U7.48@35.73,65.159
  Component Side w0.5: v1(25.4,84.963) 25.4,80.137 24.003,78.74 21.082,78.74 20.447,78.105 20.447,71.501 22.225,69.723 32.313,69.723 33.782,68.254 C38.1@33.782,66.675
  other v1: 24.257,84.963 26.416,84.963 25.019,85.598 25.908,85.598 23.749,86.106 25.019,86.36 25.908,86.36 25.019,87.122 25.908,87.122 23.876,87.249 25.019,87.884 25.908,87.884
U2_BMB2: C39.1 JP3.2 Q10.3 Q12.2 U7.45 | length 20
  Component Side w0.279: C39.1@36.896,68.961 36.896,68.641 37.231,68.306 U7.45@37.231,65.159
  Component Side w0.5: v1(36.068,81.153) v1(36.068,80.264) 36.068,70.485 36.576,69.977 C39.1@36.576,69.596
  Bottom Layer w0.5: v1(36.068,80.264) v1(36.068,81.153) v1@36.068,84.582
  other v1: 35.433,84.582 36.195,84.709 36.957,84.709 35.433,85.344 36.195,85.471 36.957,85.598 34.29,86.106 35.433,86.106 36.195,86.106 36.957,86.487 35.433,86.868 36.195,86.868 34.163,87.376 35.433,87.63
U2_CA1: C44.2 U7.42 | length 5
  Component Side w0.279: U7.42@38.73,65.159 38.73,67.686 40.132,69.088 C44.2@40.132,69.596
U2_CA2: C45.2 U7.35 | length 3.7
  Component Side w0.279: U7.35@42.68,63.208 44.2,63.208 44.434,63.442 44.9,63.442 45.212,63.754 C45.2@45.212,64.709
U2_CB1: C38.2 U7.2 | length 5.2
  Component Side w0.279: C38.2@31.689,66.675 31.689,64.704 33.185,63.208 U7.2@34.282,63.208
U2_CB2: C39.2 U7.43 | length 4.6
  Component Side w0.279: U7.43@38.232,65.159 38.232,68.199 38.481,68.448 38.481,69.395 C39.2@38.682,69.596
U2_DRV_ENN: R43.1 U3.77 U7.28 | length 25.9
  Component Side w0.279: U7.28@42.68,59.708 43.695,59.708 43.967,59.436 45.402,59.436 R43.1@47.102,57.737 ; U3.77@45.728,45.453 45.718,45.463 45.718,47.242 46.482,48.006 49.911,48.006 50.546,48.641 50.546,57.531 49.657,58.42 47.371,58.42 47.102,58.151 R43.1@47.102,57.737 ; R43.1@47.102,57.531 R43.1@47.102,57.737